# Altium PCB MotoControl_V1.0.PcbDoc
Units mm, origin at the board's own origin, x right, y up, seen from the top; angles counter-clockwise.
Board outline 51.5 x 48 mm, 2 copper layers (Top Layer, Bottom Layer), stack 1.671 mm thick; 68 components, 40 nets, 180 pads, 54 vias.
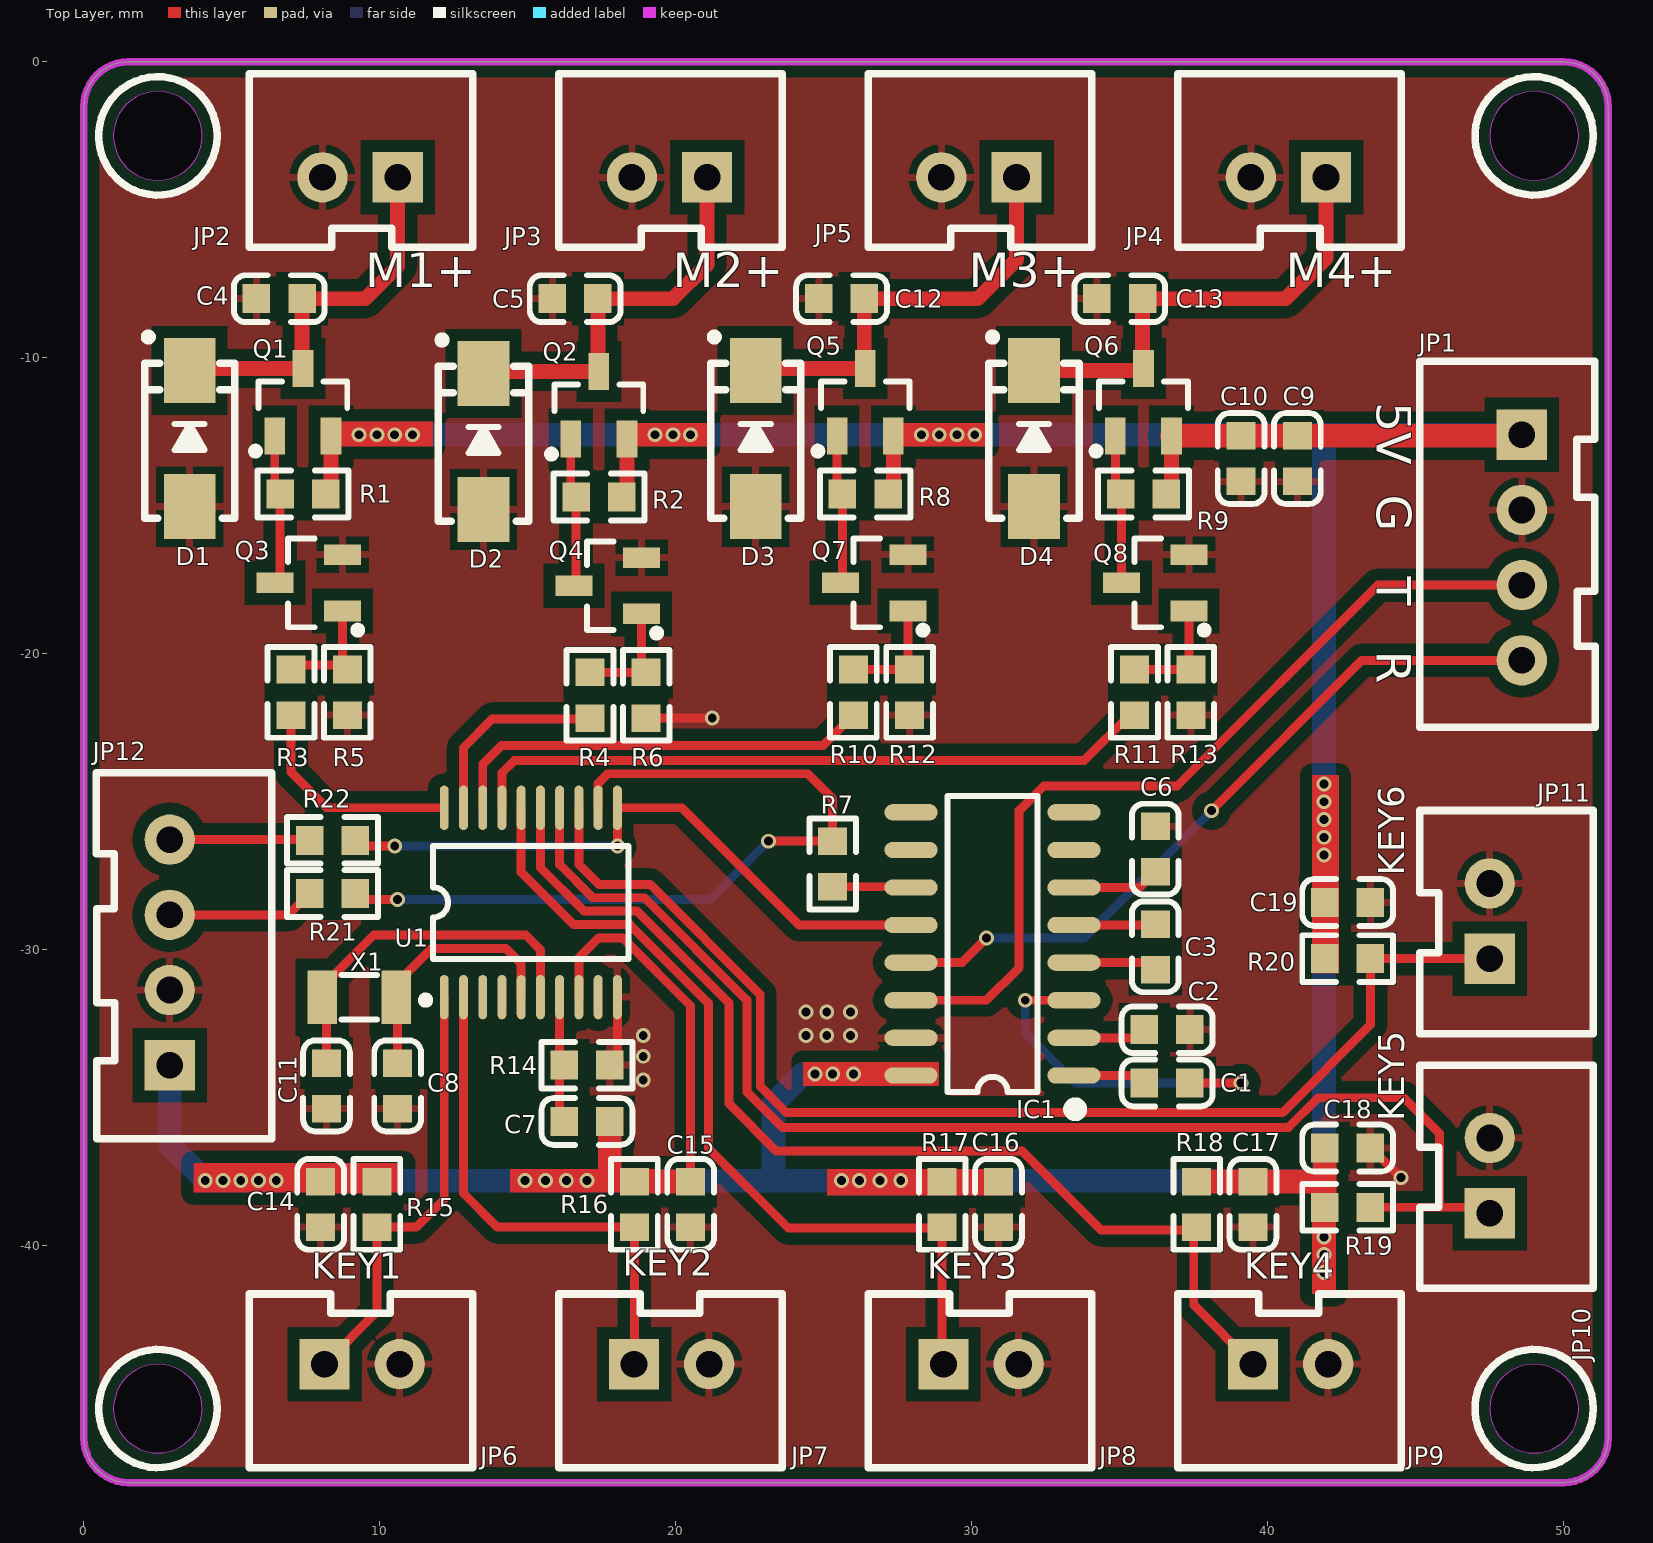
[diagram p0: Top Layer view]
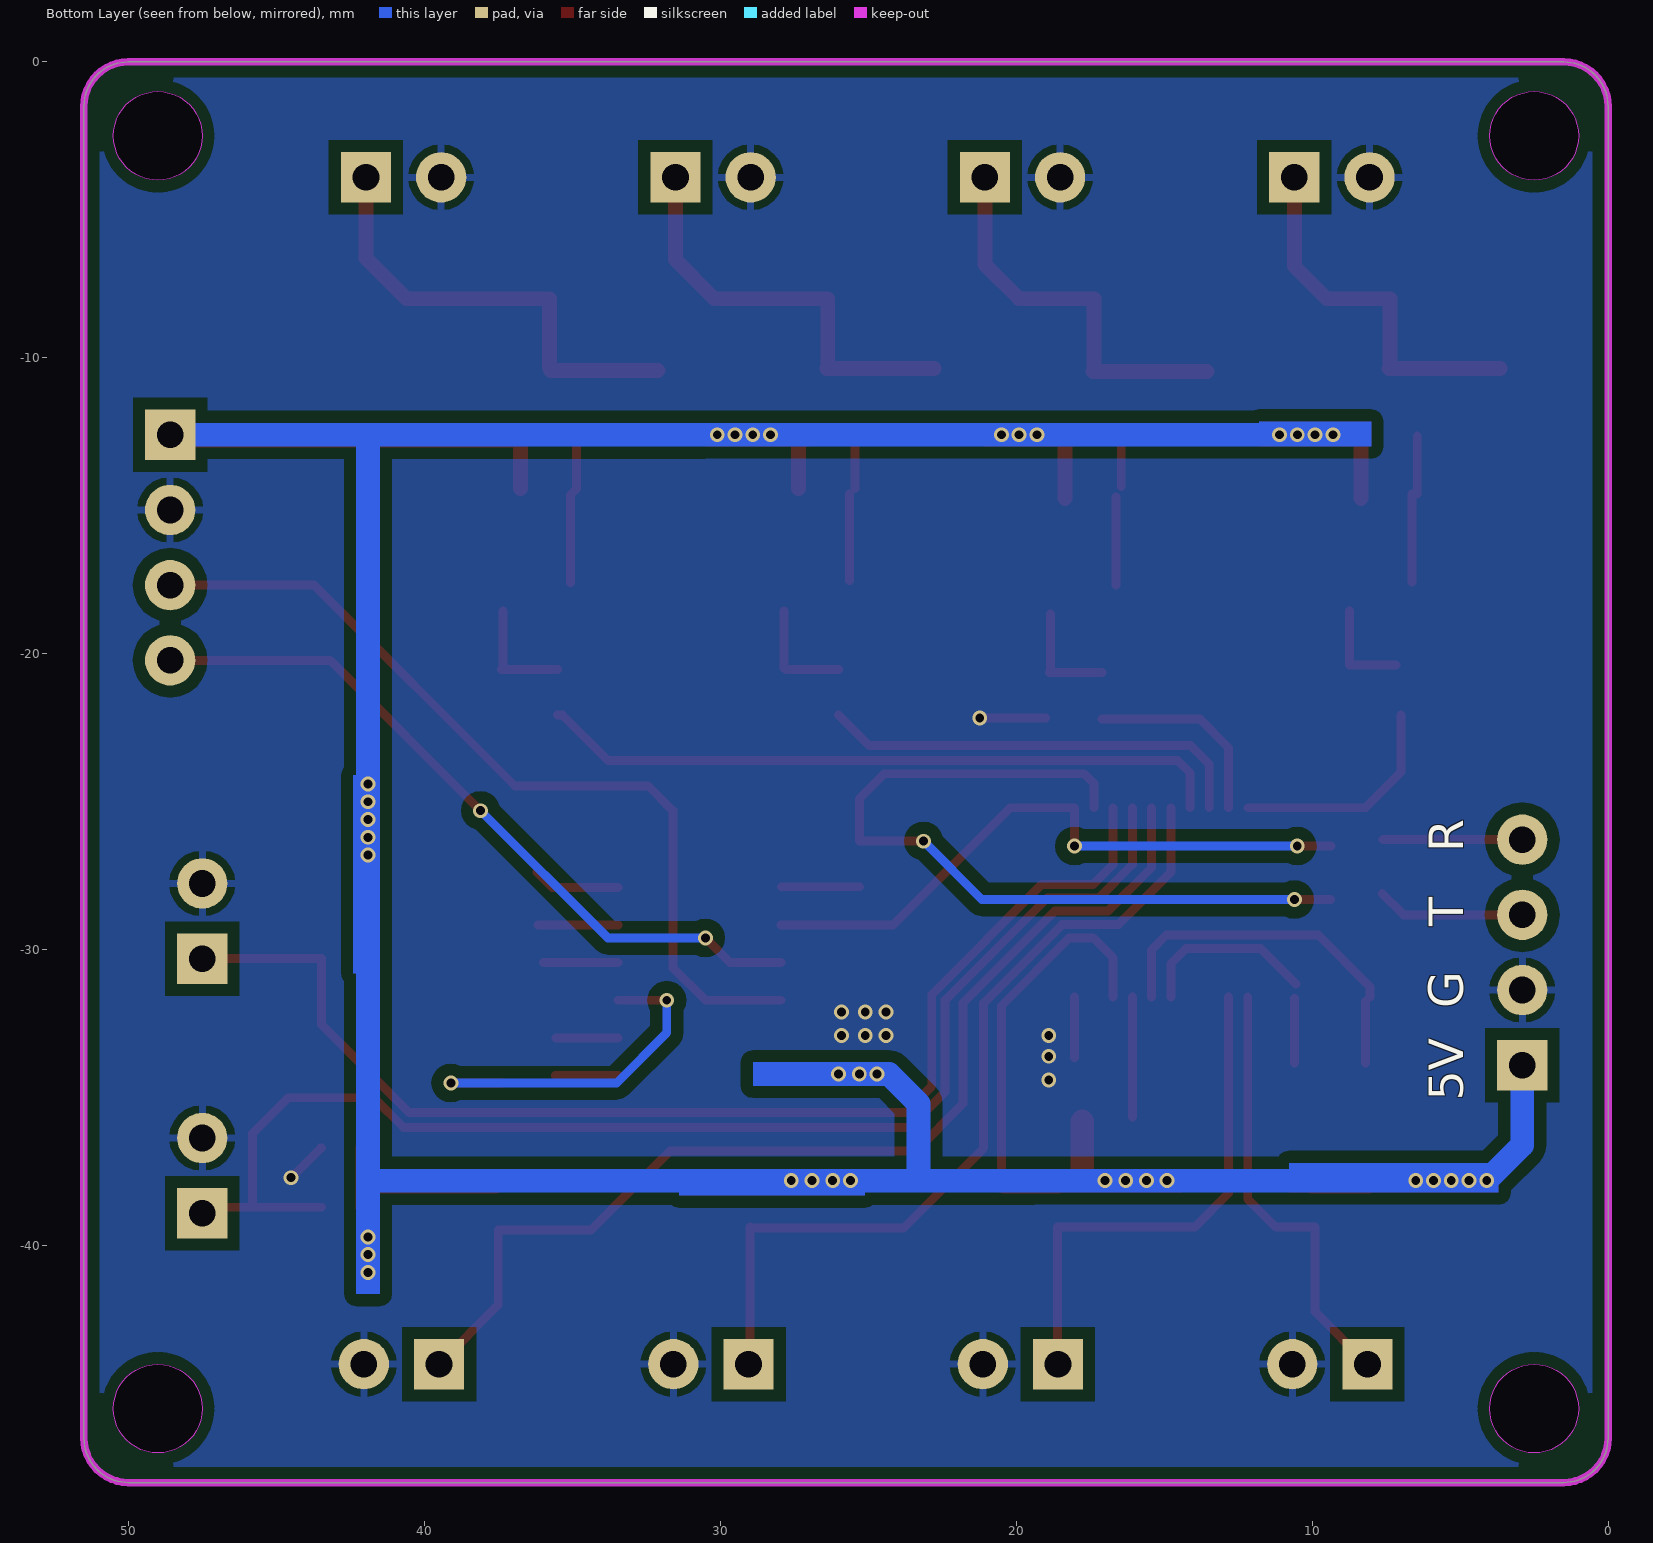
[diagram p1: Bottom Layer view, seen from below]
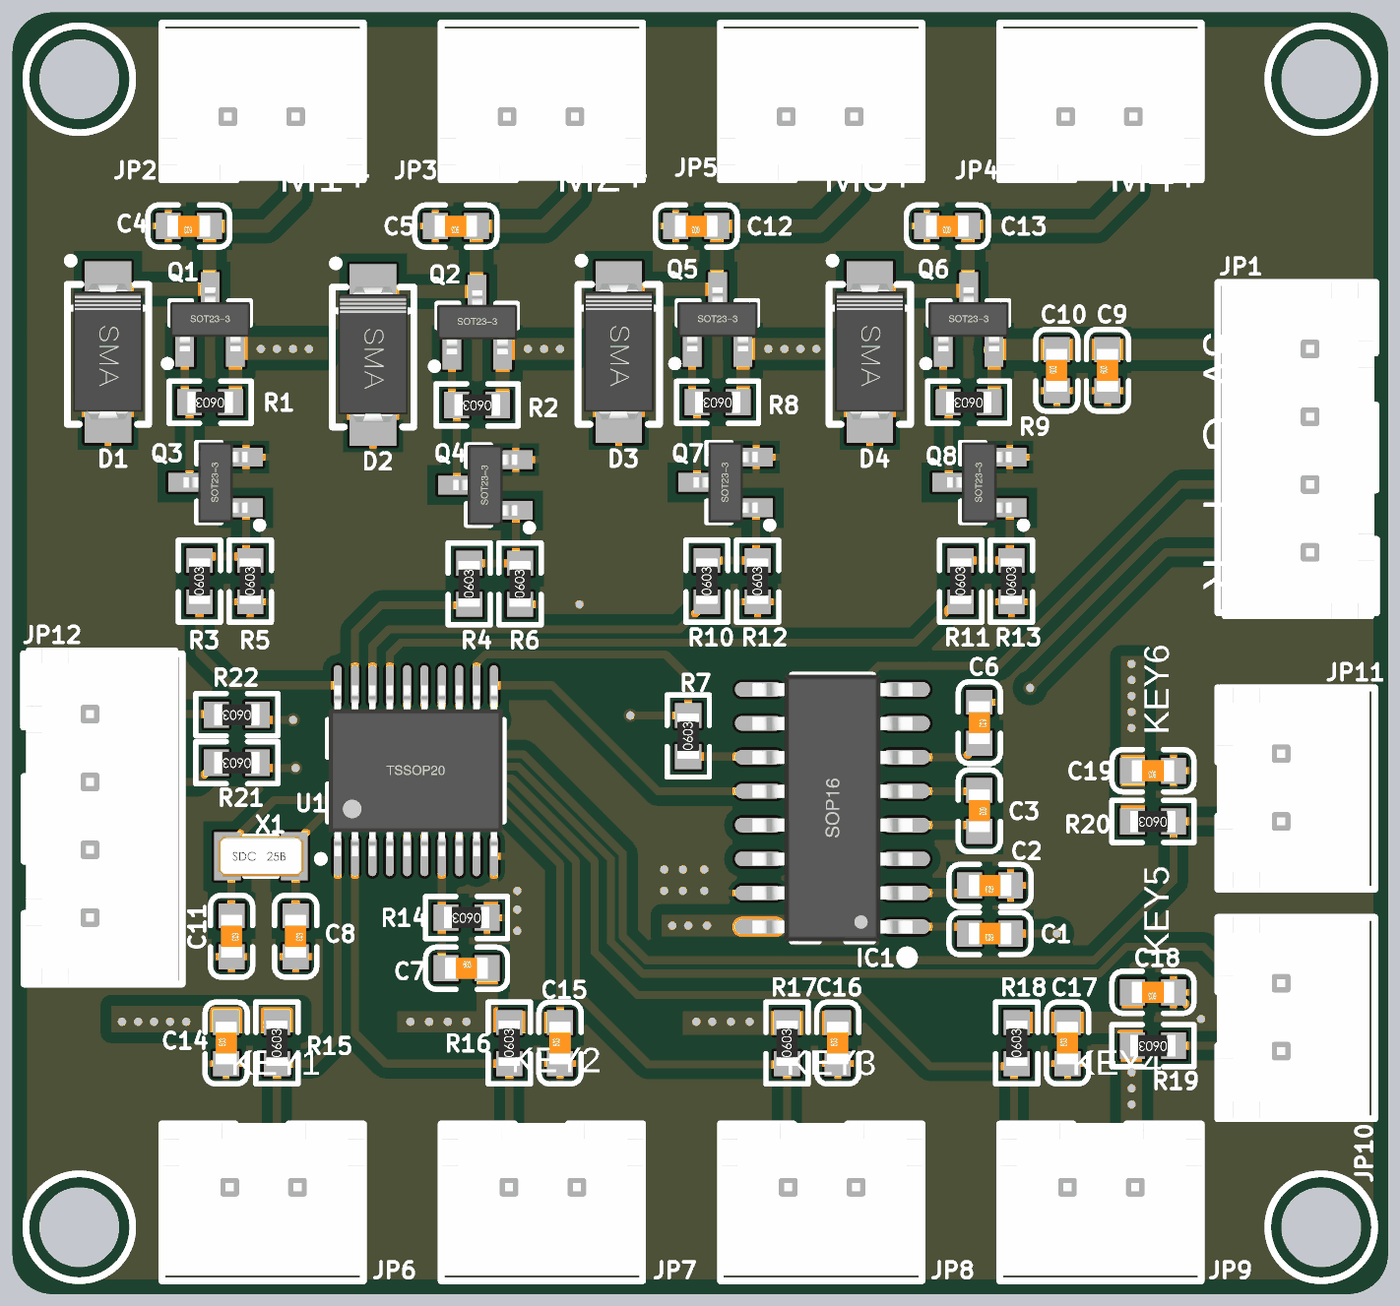
[diagram p2: 3D render of the assembled board from above, using the file's embedded part models]

## Layer stack, top to bottom
Top Solder: solder mask 0.0102, Solder Resist, Dk 3.5
Top Layer: signal copper 0.0356
Dielectric1: dielectric 1.6, FR-4, Dk 4.8
Bottom Layer: signal copper 0.0356
Bottom Solder: solder mask 0.0102, Solder Resist, Dk 3.5

## Board outline
0,-46.5 0,-1.5 cw(c1.5,-1.5) 1.5,0 50,0 cw(c50,-1.5) 51.5,-1.5 51.5,-46.5 cw(c50,-46.5) 50,-48 1.5,-48 cw(c1.5,-46.5)
cut-out: 1,-2.5 ccw(c2.5,-2.5) 2.5,-4 ccw(c2.5,-2.5) 4,-2.5 ccw(c2.5,-2.5) 2.5,-1 ccw(c2.5,-2.5)
cut-out: 47.5,-2.5 ccw(c49,-2.5) 49,-4 ccw(c49,-2.5) 50.5,-2.5 ccw(c49,-2.5) 49,-1 ccw(c49,-2.5)
cut-out: 1,-45.5 ccw(c2.5,-45.5) 2.5,-47 ccw(c2.5,-45.5) 4,-45.5 ccw(c2.5,-45.5) 2.5,-44 ccw(c2.5,-45.5)
cut-out: 47.5,-45.5 ccw(c49,-45.5) 49,-47 ccw(c49,-45.5) 50.5,-45.5 ccw(c49,-45.5) 49,-44 ccw(c49,-45.5)

## Design rules (kind name [scope] priority, off if disabled: settings)
Clearance NRF51822_ANT [InNetClass('NRF51822_ANT')OR InNetClass('WIFI_ANT')] p1: gap=0.127
Clearance USB_6_7 [HasPad('USB1-6')  OR  HasPad('USB1-7')] p2: gap=0.1
Clearance Free-J [HasPad('Free-J')] p3: gap=1
Clearance Polygon_GND [(InNamedPolygon('Top_Layer-GND'))or(InNamedPolygon('Bottom_Layer-GND'))or (InNamedPolygon('Top_Layer-GND1')) or (InNamedPolygon('Bottom_Layer-GND1'))] p4: gap=0.4
Clearance QFN40P600X600X90-48N [HasFootprint('QFN40P600X600X90-48N')OR HasFootprint('QFN-20_4x4x05P')] p5: gap=0.152
Clearance [All] p6: gap=0.152
ComponentClearance [All] p1 off: gap=0.254 collisioncheckmode=3 verticalgap=0.254 showdistances=FALSE
FabricationTestPointUsage TestPointUsage [All] p1: valid=0 allowmultiple=FALSE
FabricationTestpoint Testpoint [(IsPad And (OnTopLayer Or OnBottomLayer))] p1: side=3 testpointundercomponent=TRUE minsize=1.016 maxsize=2.54 preferedsize=1.524 minholesize=0 maxholesize=1.016 preferedholesize=0.813 testpointgrid=0.025 allowsidetop=TRUE allowsidebottom=TRUE usegrid=TRUE gridtolerance=0
PolygonConnect PolygonConn [IsVia + InNamedPolygon('TopLayer-gnd')] p1: connectstyle=Direct reliefconductorwidth=0.254 reliefentries=4 polygonreliefangle="90 Angle" airgapwidth=0.254
PolygonConnect VIA [isVia and innet(gnD)] p2: connectstyle=Direct reliefconductorwidth=0.254 reliefentries=4 polygonreliefangle="90 Angle" airgapwidth=0.254
PolygonConnect [All] p3: connectstyle=Relief reliefconductorwidth=0.254 reliefentries=4 polygonreliefangle="90 Angle" airgapwidth=0.254
RoutingVias [All] p1: holewidth=0.3 width=0.5 viastyle="Through Hole" minholewidth=0.025 minwidth=0.025 maxholewidth=1 maxwidth=1.27
ShortCircuit NRF24l01_PAD [HasPad('ANT1-1')or HasPad('ANT1-2')or HasPad('ANT1-3')or HasPad('ANT1-4')or HasPad('ANT1-5')or HasPad('ANT1-6')or HasPad('ANT1-7')or HasPad('ANT1-8')or HasPad('ANT1-9')or HasPad('ANT1-10')or HasPad('ANT1-11')or HasPad('ANT1-12')or HasPad('ANT1-13')or HasPad('ANT1-14')or HasPad('ANT1-15')or HasPad('ANT1-16')] p1: allowed=TRUE
ShortCircuit [All] p2: allowed=FALSE
SolderMaskExpansion [All] p1: expansion=0.102
Width [All] p1: maxlimit=3 minlimit=0.127 preferedwidth=0.2 minimp=50.000000 maximp=50.000000 favimp=50.000000
26 further rules are at their usual default settings.

## Components (designator, comment, footprint, x,y, rotation, side; value= is the part's Value field where it differs from the comment)
C1 "100nF" C_0603 36.6,-34.5 r180 top
C2 "100nF" C_0603 36.6,-32.7 r180 top
C3 "100nF" C_0603 36.2,-29.9 r270 top
C4 "100nF" C_0603 6.6,-8 r180 top
C5 "100nF" C_0603 16.6,-8 r180 top
C6 "100nF" C_0603 36.2,-26.6 r270 top
C7 "10uF" C_0603 17,-35.8 r0 top
C8 "12pF" C_0603 10.6,-34.6 r270 top
C9 "100nF" C_0603 41,-13.4 r90 top
C10 "10uF" C_0603 39.1,-13.4 r90 top
C11 "12pF" C_0603 8.2,-34.6 r270 top
C12 "100nF" C_0603 25.6,-8 r180 top
C13 "100nF" C_0603 35,-8 r180 top
C14 "100nF" C_0603 8,-38.6 r90 top
C15 "100nF" C_0603 20.5,-38.6 r90 top
C16 "100nF" C_0603 30.9,-38.6 r90 top
C17 "100nF" C_0603 39.5,-38.6 r90 top
C18 "100nF" C_0603 42.7,-36.7 r180 top
C19 "100nF" C_0603 42.7,-28.4 r180 top
D1 "M7" SMA 3.575,-12.725 r90 top
D2 "M7" SMA 13.5,-12.825 r90 top
D3 "M7" SMA 22.7,-12.725 r90 top
D4 "M7" SMA 32.1,-12.725 r90 top
IC1 "MAX232" SOP16_N 30.7,-29.8 r180 top
JP1 "HDR-1X4" XH2.54-4P 48.585,-12.6 r270 top
JP2 "HDR-1X2" XH2.54-2P 10.6,-3.9 r180 top
JP3 "HDR-1X2" XH2.54-2P 21.056,-3.9 r180 top
JP4 "HDR-1X2" XH2.54-2P 41.969,-3.9 r180 top
JP5 "HDR-1X2" XH2.54-2P 31.513,-3.9 r180 top
JP6 "HDR-1X2" XH2.54-2P 8.131,-44 r0 top
JP7 "HDR-1X2" XH2.54-2P 18.587,-44 r0 top
JP8 "HDR-1X2" XH2.54-2P 29.044,-44 r0 top
JP9 "HDR-1X2" XH2.54-2P 39.5,-44 r0 top
JP10 "HDR-1X2" XH2.54-2P 47.5,-38.9 r90 top
JP11 "HDR-1X2" XH2.54-2P 47.5,-30.3 r90 top
JP12 "HDR-1X4" XH2.54-4P 2.9,-33.9 r90 top
Q1 "SI2301" SOT23-3N 7.4,-11.5 r0 top
Q2 "SI2301" SOT23-3N 17.4,-11.6 r0 top
Q3 "SS8050-Y1" SOT23-3N 7.6,-17.6 r90 top
Q4 "SS8050-Y1" SOT23-3N 17.7,-17.7 r90 top
Q5 "SI2301" SOT23-3N 26.4,-11.5 r0 top
Q6 "SI2301" SOT23-3N 35.8,-11.5 r0 top
Q7 "SS8050-Y1" SOT23-3N 26.7,-17.6 r90 top
Q8 "SS8050-Y1" SOT23-3N 36.2,-17.6 r90 top
R1 "1M" R_0603 7.4,-14.6 r180 top
R2 "1M" R_0603 17.4,-14.7 r180 top
R3 "1K" R_0603 7,-21.3 r90 top
R4 "1K" R_0603 17.1,-21.4 r90 top
R5 "1M" R_0603 8.9,-21.3 r90 top
R6 "1M" R_0603 19,-21.4 r90 top
R7 "300R" R_0603 25.3,-27.1 r90 top
R8 "1M" R_0603 26.4,-14.6 r180 top
R9 "1M" R_0603 35.8,-14.6 r180 top
R10 "1K" R_0603 26,-21.3 r90 top
R11 "1K" R_0603 35.5,-21.3 r90 top
R12 "1M" R_0603 27.9,-21.3 r90 top
R13 "1M" R_0603 37.4,-21.3 r90 top
R14 "10K" R_0603 17,-33.9 r180 top
R15 "10K" R_0603 9.9,-38.6 r90 top
R16 "10K" R_0603 18.6,-38.6 r90 top
R17 "10K" R_0603 29,-38.6 r90 top
R18 "10K" R_0603 37.6,-38.6 r90 top
R19 "10K" R_0603 42.7,-38.7 r180 top
R20 "10K" R_0603 42.7,-30.3 r180 top
R21 "0R" R_0603 8.4,-28.1 r180 top
R22 "0R" R_0603 8.4,-26.3 r180 top
U1 "STC8F2K08S2" TSSOP20_N 15.1,-28.4 r90 top
X1 "12MHz" SMD-3215_2P 9.3,-31.6 r0 top

## Footprints (in the part's own frame and the unit in brackets; to place one, negate y for a bottom-side part, rotate by r counter-clockwise, add the part's x,y. Pads: shape width x height; smd on the part's side, far side on the other; paste and mask are expansions set on the pad)
C_0603 [mm]
  rect 0.93x0.98 smd: 1(-0.77,0) 2(0.77,0)
  silkscreen extent -1.53,-0.79 1.54,0.79, body extent -0.8,-0.4 0.8,0.4, height 0.3
R_0603 [mm]
  rect 0.93x0.98 smd: 1(-0.77,0) 2(0.77,0)
  silkscreen extent -1.53,-0.79 1.54,0.79, body extent -0.85,-0.4 0.85,0.4, height 0.56
SMA [mm] "4.5x2.6*2.2mm（长宽高，不包括引脚）"
  rect 2.2x1.75 smd: 1(-2.3,0) 2(2.3,0)
  silkscreen extent -2.7,-1.52 3.56,1.52, body extent -2.53,-1.3 2.58,1.3, height 2.15
SMD-3215_2P [mm] "EPSON TOYOCOM - SMD-3215_2P 32.768KHZ ?0PPM,9.0PF - CRYSTAL, SM, WATCH"
  rect 1x1.8 smd: 1(-1.25,0) 2(1.25,0)
  silkscreen extent -0.6,-0.75 0.6,0.75, body extent -1.6,-0.75 1.6,0.75, height 0.81
SOP16_N [mm] "10.3*6.2*1.8mm（长宽高）"
  oval 1.8x0.55 smd: 1(-2.75,4.445) 2(-2.75,3.175) 3(-2.75,1.905) 4(-2.75,0.635) 5(-2.75,-0.635) 6(-2.75,-1.905) 7(-2.75,-3.175) 8(-2.75,-4.445) 9(2.75,-4.445) 10(2.75,-3.175) 11(2.75,-1.905) 12(2.75,-0.635) 13(2.75,0.635) 14(2.75,1.905) 15(2.75,3.175) 16(2.75,4.445)
  silkscreen extent -2.95,-5 1.52,5.74, body extent -3,-5 3,5, height 1.9
SOT23-3N [mm] "3x1.3x1mm(长宽高)"
  rect 0.7x1.25 smd: 1(-0.95,-1.143) 2(0.95,-1.143) 3(0,1.143)
  silkscreen extent -1.72,-1.78 1.5,0.7, body extent -1.5,-1.2 1.5,1.2, height 1.05
TSSOP20_N [mm] "6.5*6.4*1（长宽高）"
  oval 1.5x0.3 smd: 1(-3.2,2.925) 2(-3.2,2.275) 3(-3.2,1.625) 4(-3.2,0.975) 5(-3.2,0.325) 6(-3.2,-0.325) 7(-3.2,-0.975) 8(-3.2,-1.625) 9(-3.2,-2.275) 10(-3.2,-2.925) 11(3.2,-2.925) 12(3.2,-2.275) 13(3.2,-1.625) 14(3.2,-0.975) 15(3.2,-0.325) 16(3.2,0.325) 17(3.2,0.975) 18(3.2,1.625) 19(3.2,2.275) 20(3.2,2.925)
  silkscreen extent -3.43,-3.3 1.91,3.69, body extent -3.2,-3.25 3.2,3.25, height 1.03
XH2.54-2P [mm] "接插件，2P"
  rect 1.7x1.7 hole 0.9: 1(0,0)
  round 1.7 hole 0.9: 2(2.54,0)
  silkscreen extent -2.54,-3.51 5.01,2.37, body extent -2.5,-3.3 5.04,2.4, height 7.05
XH2.54-4P [mm] "接插件，4P"
  rect 1.7x1.7 hole 0.9: 1(0,0)
  round 1.7 hole 0.9: 2(2.54,0) 3(5.08,0) 4(7.62,0)
  silkscreen extent -2.49,-3.45 9.88,2.49, body extent -2.5,-3.3 10.12,2.4, height 7.03

## Part data
C1 C2 C3 C4 C5 C6 C7 C8 C9 C10 C11 C12 C13 C14 C15 C16 C17 C18 C19: library part C, "无极性贴片电容"
D1 D2 D3 D4: "整流二极管"
JP1 JP12: library part "Header 4", "4P接插件"
JP2 JP3 JP4 JP5 JP6 JP7 JP8 JP9 JP10 JP11: library part "Header 2", "2P接插件"
Q1 Q2 Q5 Q6: "P沟道场效应管"
Q3 Q4 Q7 Q8: library part 8050-Y1-SMD, "高频放大-NPN型"
R1 R2 R3 R4 R5 R6 R7 R8 R9 R10 R11 R12 R13: library part R, "±1%"
R14 R15 R16 R17 R18 R19 R20 R21 R22: library part R, "贴片电阻"
U1: "STC单片机"
X1: library part XTAL-2, "2脚晶振"

## Via types
v1: diameter 0.5, hole 0.3, Top Layer to Bottom Layer, tented both sides, 54 vias

## Nets (pads, with @x,y where several pads share a name; then routed paths per layer and width w, separated by ;. In a path a pad name is that pad's centre, name@x,y a point inside that pad or via, vN(x,y) a via of type N, cw(c..) or ccw(c..) an arc to the next point about the centre after c; other vN are vias at no path point)
GND: C2.1 C4.2 C5.2 C6.1 C8.2 C9.1 C10.1 C11.2 C12.2 C13.2 C14.1 C15.1 C16.1 C17.1 C18.1 C19.1 D1.1 D2.1 D3.1 D4.1 IC1.15 JP1.2 JP2.2 JP3.2 JP4.2 JP5.2 JP6.2 JP7.2 JP8.2 JP9.2 JP10.2 JP11.2 JP12.2 Q3.2 Q4.2 Q7.2 Q8.2 R5.1 R6.1 R12.1 R13.1 R14.1 U1.10 | length 5.7
  Top Layer w0.3: R14.1@18.025,-33.645 U1.10 ; R6.1 v1(21.23,-22.17) ; C18.1 43.5,-36.7 v1(44.5,-37.7)
  other v1: 18.9,-34.4 18.9,-33.6 18.9,-32.9 24.4,-32.9 25.1,-32.9 25.9,-32.9 24.4,-32.1 25.1,-32.1 25.9,-32.1
IO_IN1: JP6.1 R15.1 U1.1 | length 14.9
  Top Layer w0.3: JP6.1 9.9,-42.231 R15.1 11.23,-39.37 12.175,-38.425 U1.1
IO_IN2: JP7.1 R16.1 U1.2 | length 17.5
  Top Layer w0.3: U1.2 12.825,-38.225 13.97,-39.37 R16.1 JP7.1@18.6,-43.987
IO_IN3: JP8.1 R17.1 U1.16 | length 28.9
  Top Layer w0.3: U1.16 14.775,-27.375 16.548,-29.148 18.448,-29.148 21.1,-31.8 21.1,-36.7 23.8,-39.4 28.97,-39.4 R17.1 JP8.1@29,-43.956
IO_IN4: JP9.1 R18.1 U1.15 | length 36.5
  Top Layer w0.3: U1.15 15.425,-27.22 16.9,-28.695 18.695,-28.695 21.8,-31.8 21.8,-35.2 23.4,-36.8 31.7,-36.8 34.37,-39.47 37.5,-39.47 37.5,-42 JP9.1
IO_IN5: JP10.1 R19.1 U1.14 | length 44.4
  Top Layer w0.3: U1.14 16.075,-27.118 17.2,-28.243 18.943,-28.243 22.4,-31.7 22.4,-34.8 23.6,-36 40.7,-36 41.7,-35 44.6,-35 45.8,-36.2 45.8,-38.7 ; R19.1 JP10.1@47.3,-38.7
IO_IN6: JP11.1 R20.1 U1.13 | length 41.4
  Top Layer w0.3: U1.13 16.725,-27.115 17.4,-27.79 19.13,-27.79 22.852,-31.513 22.852,-34.613 23.74,-35.5 40.5,-35.5 43.47,-32.53 R20.1 JP11.1
M1: R3.1 U1.20 | length 7.6
  Top Layer w0.3: R3.1 7,-24 8.2,-25.2 U1.20
M1+: C4.1 D1.2 JP2.1 Q1.3 | length 12.8
  Top Layer w0.5: D1.2@3.643,-10.357 Q1.3 ; Q1.3@7.37,-10.327 C4.1 9.5,-8 10.6,-6.9 JP2.1
M2: R4.1 U1.19 | length 6.7
  Top Layer w0.3: U1.19 12.825,-23.175 13.8,-22.2 R4.1@17.1,-22.2
M2+: C5.1 D2.2 JP3.1 Q2.3 | length 13.4
  Top Layer w0.5: D2.2@13.557,-10.457 Q2.3 ; Q2.3@17.37,-10.427 C5.1 19.9,-8 21.056,-6.844 JP3.1
M3: R10.1 U1.18 | length 14.7
  Top Layer w0.3: U1.18 13.475,-23.725 14.1,-23.1 24.97,-23.1 R10.1
M3+: C12.1 D3.2 JP5.1 Q5.3 | length 14.4
  Top Layer w0.5: D3.2@22.768,-10.357 Q5.3 ; Q5.3@26.37,-10.327 C12.1 30.2,-8 31.513,-6.687 JP5.1
M4: R11.1 U1.17 | length 23.4
  Top Layer w0.3: U1.17 14.125,-24.027 14.552,-23.6 33.8,-23.6 35.33,-22.07 R11.1
M4+: C13.1 D4.2 JP4.1 Q6.3 | length 15.5
  Top Layer w0.5: D4.2 Q6.3@35.732,-10.425 ; Q6.3@35.77,-10.327 C13.1 40.6,-8 41.969,-6.631 JP4.1
MCU_RXD: IC1.12 R22.1 U1.11 | length 21.5
  Top Layer w0.3: R22.1@9.365,-26.495 v1(10.505,-26.495) ; v1(18.025,-26.495) U1.11 20.2,-25.2 24.165,-29.165 IC1.12
  Bottom Layer w0.3: v1(10.505,-26.495) v1(18.025,-26.495)
MCU_TXD: R7.2 R21.1 U1.12 | length 27.4
  Top Layer w0.3: R21.1@9.37,-28.3 v1(10.6,-28.3) ; U1.12 17.375,-24.377 17.7,-24.052 24.452,-24.052 25.3,-24.9 R7.2 v1(23.13,-26.33)
  Bottom Layer w0.3: v1(10.6,-28.3) 21.16,-28.3 v1(23.13,-26.33)
NetC1_1: C1.1 IC1.3 | length 12.5
  Top Layer w0.3: v1(31.805,-31.705) IC1.3 ; C1.1 v1(39.1,-34.5)
  Bottom Layer w0.3: v1(31.805,-31.705) 31.805,-32.805 33.5,-34.5 v1(39.1,-34.5)
NetC1_2: C1.2 IC1.1 | length 2.1
  Top Layer w0.3: IC1.1 C1.2@35.575,-34.245
NetC2_2: C2.2 IC1.2 | length 2.1
  Top Layer w0.3: IC1.2 C2.2@35.555,-32.975
NetC3_1: C3.1 IC1.5 | length 2.7
  Top Layer w0.3: IC1.5 C3.1@36.165,-29.165
NetC3_2: C3.2 IC1.4 | length 2.5
  Top Layer w0.3: IC1.4 C3.2@35.965,-30.435
NetC6_2: C6.2 IC1.6 | length 3
  Top Layer w0.3: IC1.6 35.675,-27.895 C6.2
NetIC1_11: IC1.11 R7.1 | length 2.6
  Top Layer w0.3: R7.1 IC1.11@27.925,-27.87
NetJP12_3: JP12.3 R21.2 | length 5
  Top Layer w0.3: JP12.3 6.91,-28.82 R21.2
NetJP12_4: JP12.4 R22.2 | length 4.7
  Top Layer w0.3: JP12.4 R22.2@7.61,-26.28
NetQ1_1: Q1.1 Q3.3 R1.2 | length 4.9
  Top Layer w0.3: R1.2@6.45,-14.6 Q1.1 ; Q3.3@6.63,-17.57 R1.2
NetQ2_1: Q2.1 Q4.3 R2.2 | length 4.6
  Top Layer w0.3: R2.2@16.45,-14.35 Q2.1 ; Q4.3@16.63,-17.67 R2.2
NetQ3_1: Q3.1 R3.2 R5.2 | length 3.4
  Top Layer w0.3: R3.2@7.157,-20.373 8.743,-20.373 Q3.1
NetQ4_1: Q4.1 R4.2 R6.2 | length 3.7
  Top Layer w0.3: R4.2 R6.2@18.87,-20.63 ; R6.2@18.843,-20.543 Q4.1
NetQ5_1: Q5.1 Q7.3 R8.2 | length 4.7
  Top Layer w0.3: R8.2@25.45,-14.42 Q5.1 ; Q7.3@25.63,-17.527 R8.2
NetQ6_1: Q6.1 Q8.3 R9.2 | length 5
  Top Layer w0.3: Q6.1 34.85,-14.42 R9.2 35.057,-14.627 Q8.3
NetQ7_1: Q7.1 R10.2 R12.2 | length 3.7
  Top Layer w0.3: R10.2 R12.2@27.786,-20.53 ; R12.2@27.843,-20.473 Q7.1
NetQ8_1: Q8.1 R11.2 R13.2 | length 3.8
  Top Layer w0.3: R11.2 R13.2 ; R13.2@37.343,-20.473 Q8.1
RS232-RX: IC1.13 JP1.4 | length 24.9
  Top Layer w0.3: IC1.13 29.665,-30.435 v1(30.5,-29.6) ; v1(38.1,-25.3) 43.18,-20.22 JP1.4
  Bottom Layer w0.3: v1(30.5,-29.6) 33.8,-29.6 v1(38.1,-25.3)
RS232-TX: IC1.14 JP1.3 | length 29.5
  Top Layer w0.3: IC1.14 30.495,-31.705 31.6,-30.6 31.6,-25.3 32.434,-24.466 36.934,-24.466 43.72,-17.68 JP1.3
RST: C7.1 R14.2 U1.7 | length 4
  Top Layer w0.3: C7.1@16.075,-35.645 U1.7
VDD-5V: C7.2 C9.2 C10.2 C14.2 C15.2 C16.2 C17.2 C18.2 C19.2 IC1.16 JP1.1 JP12.1 Q1.2 Q2.2 Q5.2 Q6.2 R1.1 R2.1 R8.1 R9.1 R15.2 R16.2 R17.2 R18.2 R19.2 R20.2 U1.8 | length 161.5
  Top Layer w0.3: U1.8 16.725,-30.275 17.4,-29.6 18.2,-29.6 20.5,-31.9 C15.2 C15.2@20.5,-37.93
  Top Layer w0.5: R1.1@8.35,-14.75 Q1.2 ; R2.1@18.35,-14.75 Q2.2 ; R8.1@27.35,-14.42 Q5.2 ; R9.1@36.75,-14.42 Q6.2
  Top Layer w0.8: C14.2@8.1,-37.83 R15.2@10,-37.83 ; 17.77,-37.7 C7.2 ; R16.2 C15.2@20.4,-37.83 ; R17.2 C16.2 ; Q6.2@36.763,-12.63 C10.2 C9.2 48.555,-12.63 JP1.1 ; R18.2 41.9,-37.83 ; R19.2 C18.2
  Bottom Layer w0.8: JP12.1 2.9,-36.6 v1(4.1,-37.8) v1(4.7,-37.8) v1(5.3,-37.8) v1(5.9,-37.8) v1(6.5,-37.8) v1(14.9,-37.8) v1(15.6,-37.8) v1(16.3,-37.8) v1(17,-37.8) 23.3,-37.8 ; v1(9.3,-12.6) v1(9.9,-12.6) v1(10.5,-12.6) v1(11.1,-12.6) v1(19.3,-12.6) v1(19.9,-12.6) v1(20.5,-12.6) v1(28.3,-12.6) v1(28.9,-12.6) v1(29.5,-12.6) v1(30.1,-12.6) 41.9,-12.6 ; v1(26,-34.2) 24.3,-34.2 23.3,-35.2 23.3,-37.8 ; 41.9,-41.2 v1(41.9,-40.9) v1(41.9,-40.3) v1(41.9,-39.7) 41.9,-37.8 ; JP1.1 41.9,-12.6 ; 23.3,-37.8 v1(25.6,-37.8) v1(26.2,-37.8) v1(26.9,-37.8) v1(27.6,-37.8) 41.9,-37.8 ; 41.9,-37.8 v1(41.9,-26.8) v1(41.9,-26.2) v1(41.9,-25.6) v1(41.9,-25) v1(41.9,-24.4) 41.9,-12.6
  other v1: 24.7,-34.2 25.3,-34.2
XTAL1: C11.1 U1.6 X1.1 | length 12.3
  Top Layer w0.3: X1.1 8.05,-31.25 9.8,-29.5 14.925,-29.5 15.425,-30 U1.6 ; C11.1 X1.1@8.2,-31.75
XTAL2: C8.1 U1.5 X1.2 | length 8.2
  Top Layer w0.3: X1.2@10.55,-31.15 11.748,-29.952 14.252,-29.952 14.775,-30.475 U1.5 ; C8.1 X1.2@10.6,-31.65
pads on no net: IC1.7 IC1.8 IC1.9 IC1.10 U1.3 U1.4 U1.9

## Polygon pours and split planes (outlines as drawn)
GND on Top Layer "Top_Layer-GND" (solid, remove dead copper, pour order 2): 0,0 0,-48 51.5,-48 51.5,0
GND on Bottom Layer "Bottom_Layer-GND" (solid, remove dead copper, pour order 4): 0,0 0,-48 51.5,-48 51.5,0

## Keep-outs
Keep-Out Layer:
  the board outline again, w0.254

## Other copper
Top Layer:
  rectangle net VDD-5V: 8,-13 11.8,-12.15
  rectangle net VDD-5V: 18,-13 21.1,-12.2
  rectangle net VDD-5V: 27,-13 30.5,-12.2
  rectangle net VDD-5V: 41.5,-30.8 42.4,-24.1
  rectangle net VDD-5V: 41.5,-41.63 42.3,-38.1
  rectangle net VDD-5V: 25.1,-38.3 31.4,-37.4
  rectangle net VDD-5V: 14.4,-38.2 19.39,-37.4
  rectangle net VDD-5V: 3.7,-38.2 10.79,-37.2
  rectangle net VDD-5V: 24.3,-34.6 28.9,-33.8
Bottom Layer:
  rectangle net VDD-5V: 8,-13 11.8,-12.15
  rectangle net VDD-5V: 18,-13 21.1,-12.2
  rectangle net VDD-5V: 27,-13 30.5,-12.2
  rectangle net VDD-5V: 41.5,-30.8 42.4,-24.1
  rectangle net VDD-5V: 41.5,-41.63 42.3,-38.1
  rectangle net VDD-5V: 25.1,-38.3 31.4,-37.4
  rectangle net VDD-5V: 14.4,-38.2 19.39,-37.4
  rectangle net VDD-5V: 3.7,-38.2 10.79,-37.2
  rectangle net VDD-5V: 24.3,-34.6 28.9,-33.8

## Silkscreen, mask and mechanical layers (free items; w line width, h text height)
Top Overlay:
  circle w0.254: c2.5,-2.5 r2
  circle w0.254: c49,-2.5 r2
  circle w0.254: c2.5,-45.5 r2
  circle w0.254: c49,-45.5 r2
  text "M1+" at 9.5,-8 h2
  text "M2+" at 19.9,-8 h2
  text "M3+" at 29.9,-8 h2
  text "M4+" at 40.6,-8 h2
  text "5V  G   T   R" at 43.3,-11.5 h2 r270
  text "KEY6" at 44.9,-27.5 h1.5 r90
  text "KEY5" at 44.9,-35.8 h1.5 r90
  text "KEY2" at 18.2,-41.3 h1.5
  text "KEY1" at 7.7,-41.4 h1.5
  text "KEY3" at 28.5,-41.4 h1.5
  text "KEY4" at 39.2,-41.4 h1.5
Bottom Overlay:
  text "5V  G   T   R" at 4.5,-35.1 h2 r270